# EAGLE board SparkFun_USB_RS485_Converter_Panel_v11 (EAGLE 7.4.0), part 1 of 4
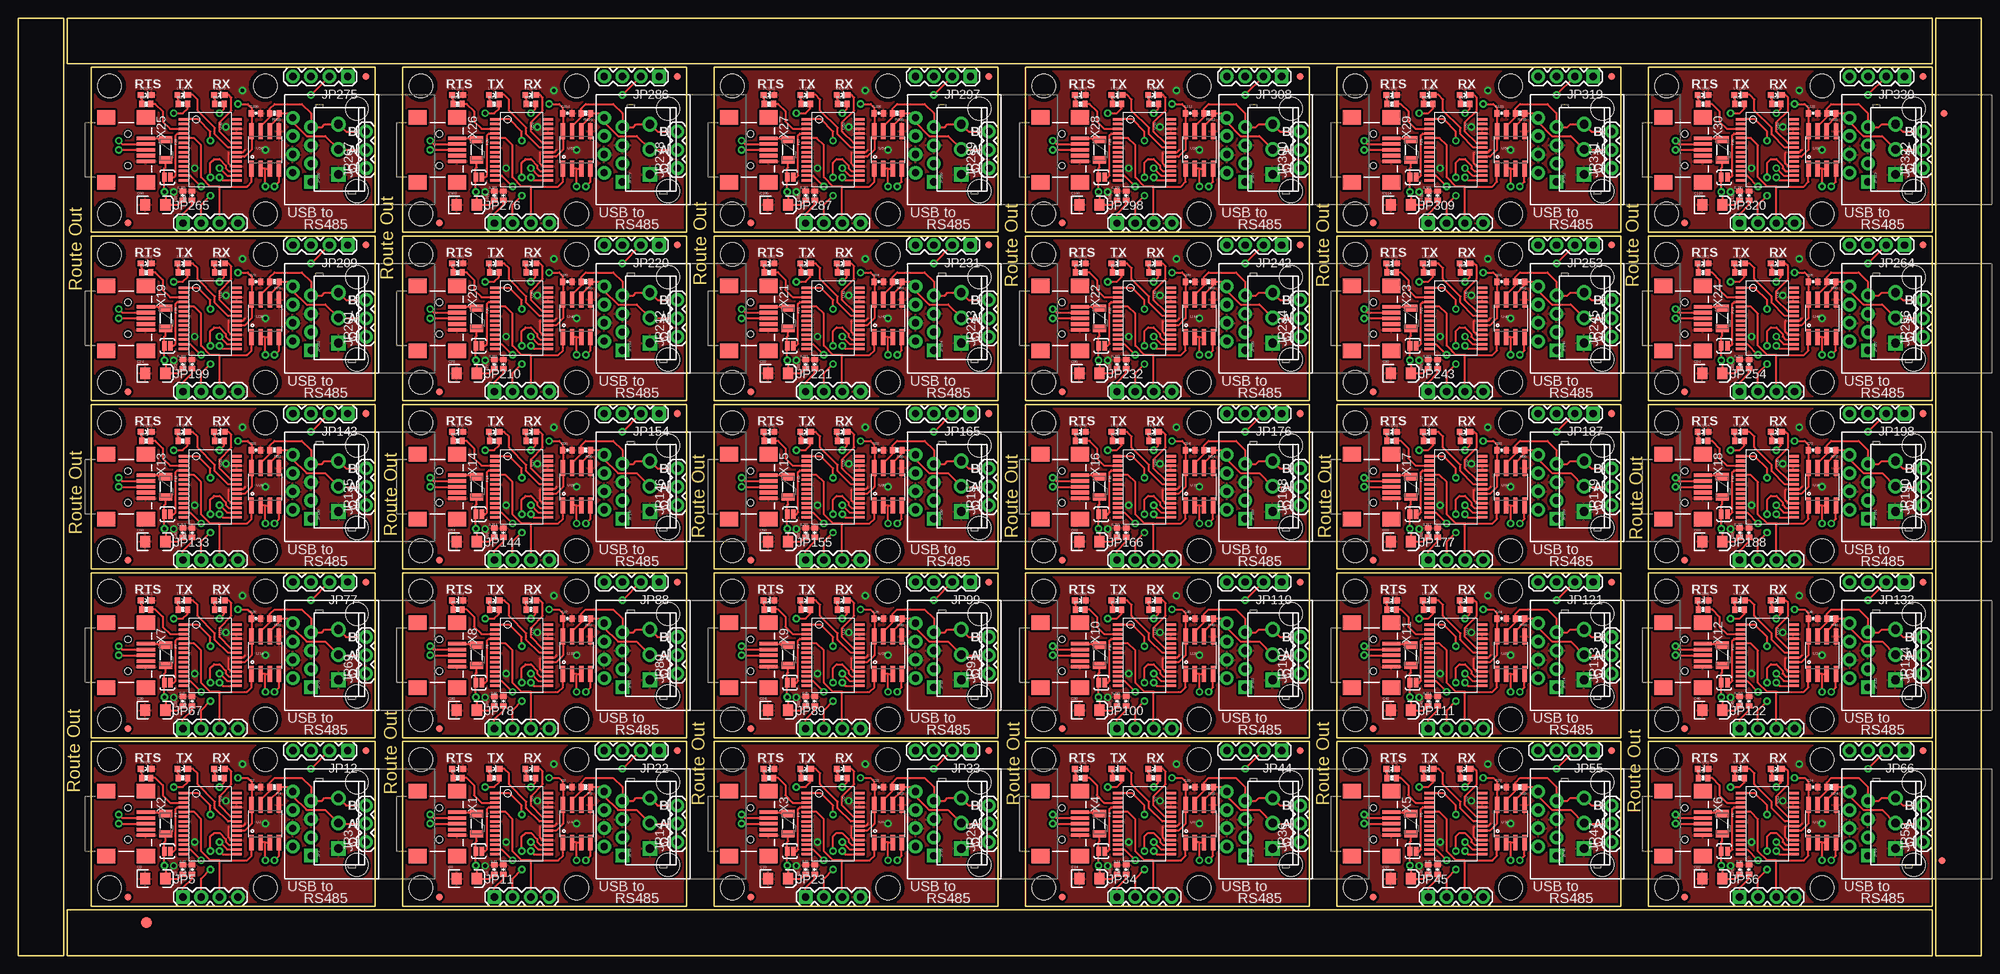
[diagram p0: board, top side]
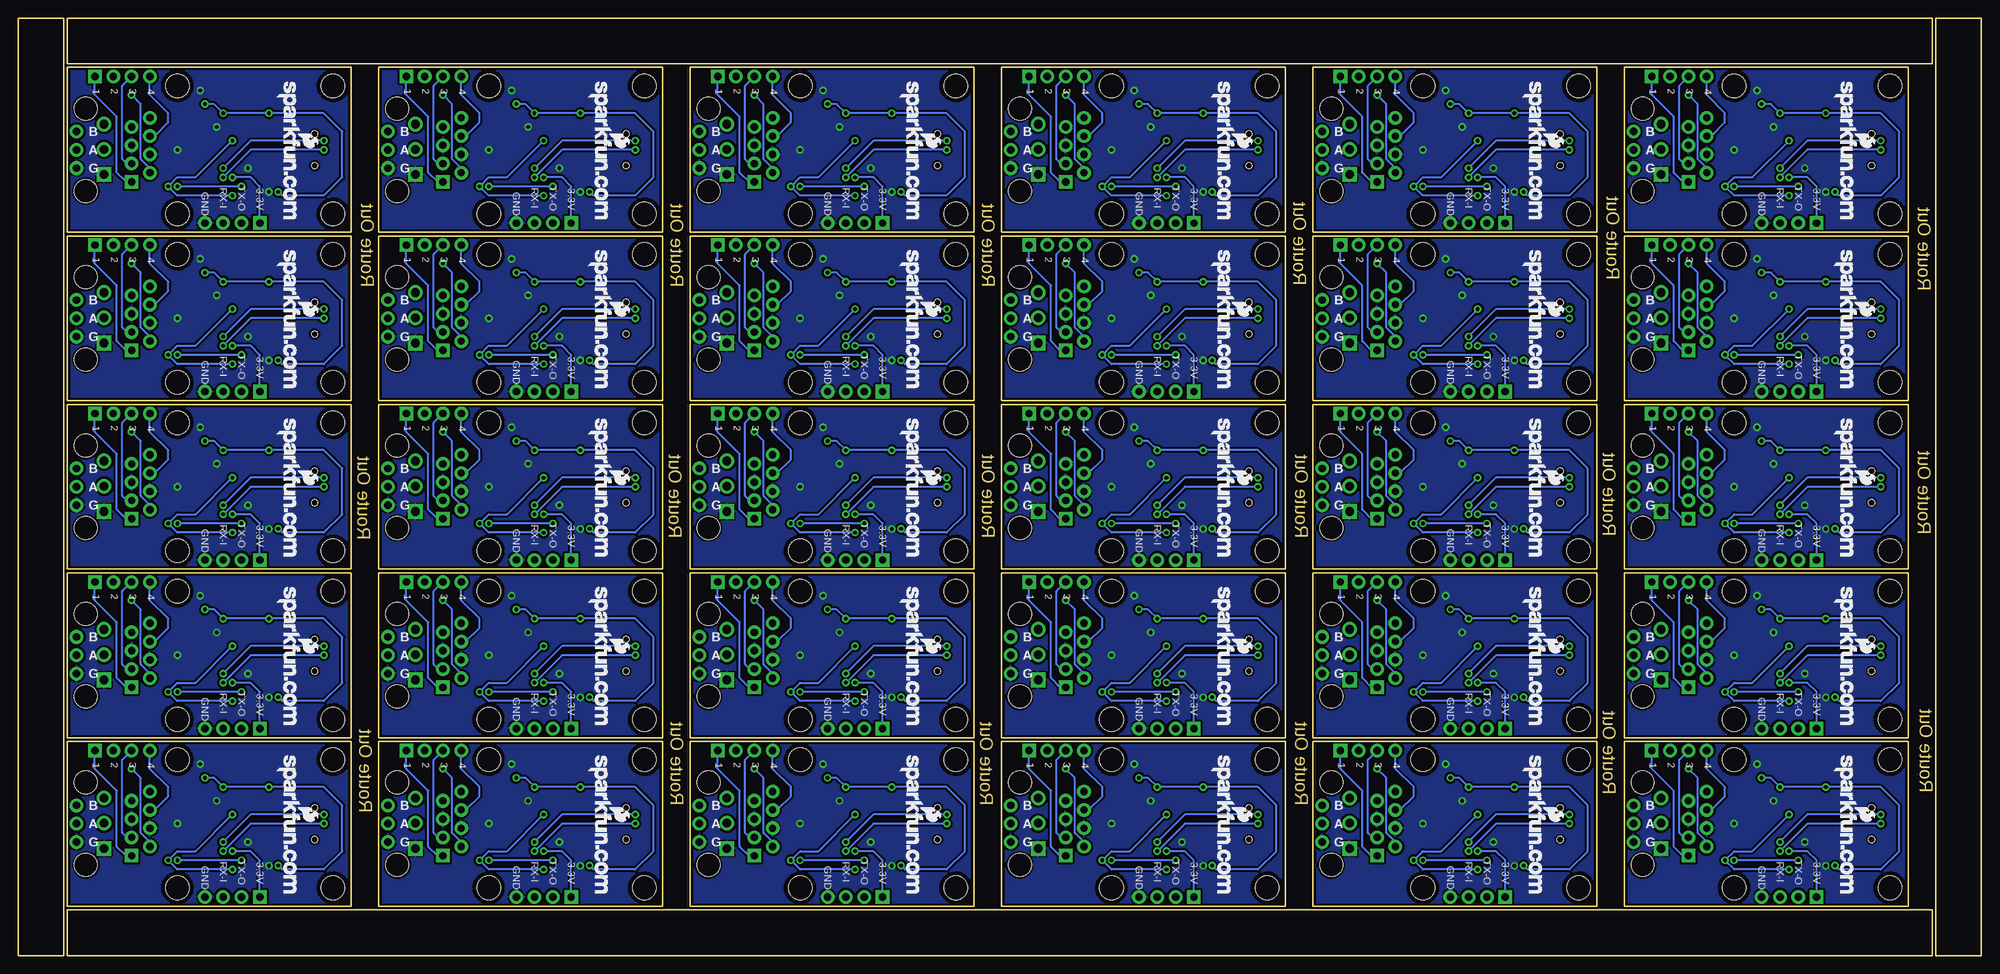
[diagram p1: board, bottom side, seen from below]

Size 272.29 x 130.05 mm. Coordinates in mm from the lower left corner, seen from the top.
Outline: 6.35,79.25 6.35,0 0,0 0,29.72
Outline: 0,27.18 0,130.05 6.35,130.05 6.35,76.71
Outline: 82.55,0 6.86,0 6.86,6.35 33.02,6.35
Outline: 30.48,6.35 265.43,6.35 265.43,0 80.01,0
Outline: 272.29,79.25 272.29,0 265.94,0 265.94,29.72
Outline: 265.94,27.18 265.94,130.05 272.29,130.05 272.29,76.71
Outline: 193.04,130.05 265.43,130.05 265.43,123.7 242.57,123.7
Outline: 245.11,123.7 6.86,123.7 6.86,130.05 195.58,130.05
Outline: 49.53,6.86 10.16,6.86 10.16,29.72 49.53,29.72 49.53,6.86
Outline: 92.71,6.86 53.34,6.86 53.34,29.72 92.71,29.72 92.71,6.86
Outline: 135.89,6.86 96.52,6.86 96.52,29.72 135.89,29.72 135.89,6.86
Outline: 179.07,6.86 139.7,6.86 139.7,29.72 179.07,29.72 179.07,6.86
Outline: 222.25,6.86 182.88,6.86 182.88,29.72 222.25,29.72 222.25,6.86
Outline: 265.43,6.86 226.06,6.86 226.06,29.72 265.43,29.72 265.43,6.86
Outline: 49.53,30.23 10.16,30.23 10.16,53.09 49.53,53.09 49.53,30.23
Outline: 92.71,30.23 53.34,30.23 53.34,53.09 92.71,53.09 92.71,30.23
Outline: 135.89,30.23 96.52,30.23 96.52,53.09 135.89,53.09 135.89,30.23
Outline: 179.07,30.23 139.7,30.23 139.7,53.09 179.07,53.09 179.07,30.23
Outline: 222.25,30.23 182.88,30.23 182.88,53.09 222.25,53.09 222.25,30.23
Outline: 265.43,30.23 226.06,30.23 226.06,53.09 265.43,53.09 265.43,30.23
Outline: 49.53,53.59 10.16,53.59 10.16,76.45 49.53,76.45 49.53,53.59
Outline: 92.71,53.59 53.34,53.59 53.34,76.45 92.71,76.45 92.71,53.59
Outline: 135.89,53.59 96.52,53.59 96.52,76.45 135.89,76.45 135.89,53.59
Outline: 179.07,53.59 139.7,53.59 139.7,76.45 179.07,76.45 179.07,53.59
Outline: 222.25,53.59 182.88,53.59 182.88,76.45 222.25,76.45 222.25,53.59
Outline: 265.43,53.59 226.06,53.59 226.06,76.45 265.43,76.45 265.43,53.59
Outline: 49.53,76.96 10.16,76.96 10.16,99.82 49.53,99.82 49.53,76.96
Outline: 92.71,76.96 53.34,76.96 53.34,99.82 92.71,99.82 92.71,76.96
Outline: 135.89,76.96 96.52,76.96 96.52,99.82 135.89,99.82 135.89,76.96
Outline: 179.07,76.96 139.7,76.96 139.7,99.82 179.07,99.82 179.07,76.96
Outline: 222.25,76.96 182.88,76.96 182.88,99.82 222.25,99.82 222.25,76.96
Outline: 265.43,76.96 226.06,76.96 226.06,99.82 265.43,99.82 265.43,76.96
Outline: 49.53,100.33 10.16,100.33 10.16,123.19 49.53,123.19 49.53,100.33
Outline: 92.71,100.33 53.34,100.33 53.34,123.19 92.71,123.19 92.71,100.33
Outline: 135.89,100.33 96.52,100.33 96.52,123.19 135.89,123.19 135.89,100.33
Outline: 179.07,100.33 139.7,100.33 139.7,123.19 179.07,123.19 179.07,100.33
Outline: 222.25,100.33 182.88,100.33 182.88,123.19 222.25,123.19 222.25,100.33
Outline: 265.43,100.33 226.06,100.33 226.06,123.19 265.43,123.19 265.43,100.33
Copper layers (1*16): Top 0.035mm / dielectric 1.5mm / Bottom 0.035mm
Design rules "SparkFun": minimum track width 8mil, minimum drill 20mil, track to track 8mil, track to pad 8mil, pad to pad 8mil, via to via 8mil, smd to smd 8mil, copper to edge 8mil, drill to drill 8mil, minimum pad ring 12mil, minimum via ring 10mil, stop-mask expansion 4mil, vias tented up to drill 20mil, thermal gap 10mil
Net classes: 0 default: width 0.203 mm; 1 power: width 0.254 mm

## Footprints (pad centres in the part's own frame; a part is rotated, then mirrored left to right if it is on the bottom)
0402-CAP = smd 0.7 x 0.9: 1 -0.65,0; 2 0.65,0
EIA3216 = smd 1.4 x 1.6: A 1.4,0; C -1.4,0
FIDUCIAL-1.5X3 = smd 1.5 x 1.5: 1 0,0
FIDUCIAL-1X2 = smd 1 x 1: 1 0,0
PTC-1206 = smd 1 x 1.8: 1 -1.4,0; 2 1.4,0
STAND-OFF = hole 3.302: 0,0
SCREWTERMINAL-3.5MM-3 = drill 1.2 pad 2.032 square: 1 0,0 | drill 1.2 pad 2.032: 2 3.5,0; 3 7,0
1X03 = drill 1.016 pad 1.88: 1 0,0; 2 2.54,0; 3 5.08,0
RJ45-8 = drill 1 pad 1.88 square: 1 -4.445,6.35 | drill 1 pad 1.88: 2 -3.175,8.89; 3 -1.905,6.35; 4 -0.635,8.89; 5 0.635,6.35; 6 1.905,8.89; 7 3.175,6.35; 8 4.445,8.89 | hole 3.2: -5.715,0; 5.715,0
1X04 = drill 1.016 pad 1.88 square: 1 0,0 | drill 1.016 pad 1.88: 2 2.54,0; 3 5.08,0; 4 7.62,0
LED-0603 = smd 0.8 x 0.8: A 0,-0.75; C 0,0.75
0402-RES = smd 0.7 x 0.9: 1 -0.65,0; 2 0.65,0
SJ_2S-NOTRACE = smd 0.635 x 1.27: 1 -0.45,0; 2 0.4,0
SSOP28DB = smd 0.348 x 1.397: 1 -4.225,-3.656; 2 -3.575,-3.656; 3 -2.925,-3.656; 4 -2.275,-3.656; 5 -1.625,-3.656; 6 -0.975,-3.656; 7 -0.325,-3.656; 8 0.325,-3.656; 9 0.975,-3.656; 10 1.625,-3.656; 11 2.275,-3.656; 12 2.925,-3.656; 13 3.575,-3.656; 14 4.225,-3.656; 15 4.225,3.656; 16 3.575,3.656; 17 2.925,3.656; 18 2.275,3.656; 19 1.625,3.656; 20 0.975,3.656; 21 0.325,3.656; 22 -0.325,3.656; 23 -0.975,3.656; 24 -1.625,3.656; 25 -2.275,3.656; 26 -2.925,3.656; 27 -3.575,3.656; 28 -4.225,3.656
SO08 = smd 0.61 x 2.21: 1 -1.905,-2.616; 2 -0.635,-2.616; 3 0.635,-2.616; 4 1.905,-2.616; 5 1.905,2.616; 6 0.635,2.616; 7 -0.635,2.616; 8 -1.905,2.616
USB-MINIB = smd 2.5 x 0.5: D+ 2.5,0; D- 2.5,0.8; GND 2.5,-1.6; ID 2.5,-0.8; VBUS 2.5,1.6 | smd 2.5 x 2: GND@1 -3,-4.5; GND@2 -3,4.5; GND@3 2.5,4.5; GND@4 2.5,-4.5 | hole 0.9: 0,2.2; 0,-2.2

## Placement (x,y rotation side)
C1  0.1uF  [0402-CAP]  24.13,11.94 90 top
C2  0.1uF  [0402-CAP]  22.86,11.94 90 top
C3  0.1uF  [0402-CAP]  33.02,23.37 0 top
C4  0.1uF  [0402-CAP]  66.04,11.94 90 top
C5  10uF  [EIA3216]  19.05,10.67 0 top
C6  10uF  [EIA3216]  62.23,10.67 0 top
C7  0.1uF  [0402-CAP]  67.31,11.94 90 top
C8  0.1uF  [0402-CAP]  76.2,23.37 0 top
C9  0.1uF  [0402-CAP]  109.22,11.94 90 top
C10  10uF  [EIA3216]  105.41,10.67 0 top
C11  0.1uF  [0402-CAP]  110.49,11.94 90 top
C12  0.1uF  [0402-CAP]  119.38,23.37 0 top
C13  0.1uF  [0402-CAP]  152.4,11.94 90 top
C14  10uF  [EIA3216]  148.59,10.67 0 top
C15  0.1uF  [0402-CAP]  153.67,11.94 90 top
C16  0.1uF  [0402-CAP]  162.56,23.37 0 top
C17  0.1uF  [0402-CAP]  195.58,11.94 90 top
C18  10uF  [EIA3216]  191.77,10.67 0 top
C19  0.1uF  [0402-CAP]  196.85,11.94 90 top
C20  0.1uF  [0402-CAP]  205.74,23.37 0 top
C21  0.1uF  [0402-CAP]  238.76,11.94 90 top
C22  10uF  [EIA3216]  234.95,10.67 0 top
C23  0.1uF  [0402-CAP]  240.03,11.94 90 top
C24  0.1uF  [0402-CAP]  248.92,23.37 0 top
C25  0.1uF  [0402-CAP]  22.86,35.31 90 top
C26  10uF  [EIA3216]  19.05,34.04 0 top
C27  0.1uF  [0402-CAP]  24.13,35.31 90 top
C28  0.1uF  [0402-CAP]  33.02,46.74 0 top
C29  0.1uF  [0402-CAP]  66.04,35.31 90 top
C30  10uF  [EIA3216]  62.23,34.04 0 top
C31  0.1uF  [0402-CAP]  67.31,35.31 90 top
C32  0.1uF  [0402-CAP]  76.2,46.74 0 top
C33  0.1uF  [0402-CAP]  109.22,35.31 90 top
C34  10uF  [EIA3216]  105.41,34.04 0 top
C35  0.1uF  [0402-CAP]  110.49,35.31 90 top
C36  0.1uF  [0402-CAP]  119.38,46.74 0 top
C37  0.1uF  [0402-CAP]  152.4,35.31 90 top
C38  10uF  [EIA3216]  148.59,34.04 0 top
C39  0.1uF  [0402-CAP]  153.67,35.31 90 top
C40  0.1uF  [0402-CAP]  162.56,46.74 0 top
C41  0.1uF  [0402-CAP]  195.58,35.31 90 top
C42  10uF  [EIA3216]  191.77,34.04 0 top
C43  0.1uF  [0402-CAP]  196.85,35.31 90 top
C44  0.1uF  [0402-CAP]  205.74,46.74 0 top
C45  0.1uF  [0402-CAP]  238.76,35.31 90 top
C46  10uF  [EIA3216]  234.95,34.04 0 top
C47  0.1uF  [0402-CAP]  240.03,35.31 90 top
C48  0.1uF  [0402-CAP]  248.92,46.74 0 top
C49  0.1uF  [0402-CAP]  22.86,58.67 90 top
C50  10uF  [EIA3216]  19.05,57.4 0 top
C51  0.1uF  [0402-CAP]  24.13,58.67 90 top
C52  0.1uF  [0402-CAP]  33.02,70.1 0 top
C53  0.1uF  [0402-CAP]  66.04,58.67 90 top
C54  10uF  [EIA3216]  62.23,57.4 0 top
C55  0.1uF  [0402-CAP]  67.31,58.67 90 top
C56  0.1uF  [0402-CAP]  76.2,70.1 0 top
C57  0.1uF  [0402-CAP]  109.22,58.67 90 top
C58  10uF  [EIA3216]  105.41,57.4 0 top
C59  0.1uF  [0402-CAP]  110.49,58.67 90 top
C60  0.1uF  [0402-CAP]  119.38,70.1 0 top
C61  0.1uF  [0402-CAP]  152.4,58.67 90 top
C62  10uF  [EIA3216]  148.59,57.4 0 top
C63  0.1uF  [0402-CAP]  153.67,58.67 90 top
C64  0.1uF  [0402-CAP]  162.56,70.1 0 top
C65  0.1uF  [0402-CAP]  195.58,58.67 90 top
C66  10uF  [EIA3216]  191.77,57.4 0 top
C67  0.1uF  [0402-CAP]  196.85,58.67 90 top
C68  0.1uF  [0402-CAP]  205.74,70.1 0 top
C69  0.1uF  [0402-CAP]  238.76,58.67 90 top
C70  10uF  [EIA3216]  234.95,57.4 0 top
C71  0.1uF  [0402-CAP]  240.03,58.67 90 top
C72  0.1uF  [0402-CAP]  248.92,70.1 0 top
C73  0.1uF  [0402-CAP]  22.86,82.04 90 top
C74  10uF  [EIA3216]  19.05,80.77 0 top
C75  0.1uF  [0402-CAP]  24.13,82.04 90 top
C76  0.1uF  [0402-CAP]  33.02,93.47 0 top
C77  0.1uF  [0402-CAP]  66.04,82.04 90 top
C78  10uF  [EIA3216]  62.23,80.77 0 top
C79  0.1uF  [0402-CAP]  67.31,82.04 90 top
C80  0.1uF  [0402-CAP]  76.2,93.47 0 top
C81  0.1uF  [0402-CAP]  109.22,82.04 90 top
C82  10uF  [EIA3216]  105.41,80.77 0 top
C83  0.1uF  [0402-CAP]  110.49,82.04 90 top
C84  0.1uF  [0402-CAP]  119.38,93.47 0 top
C85  0.1uF  [0402-CAP]  152.4,82.04 90 top
C86  10uF  [EIA3216]  148.59,80.77 0 top
C87  0.1uF  [0402-CAP]  153.67,82.04 90 top
C88  0.1uF  [0402-CAP]  162.56,93.47 0 top
C89  0.1uF  [0402-CAP]  195.58,82.04 90 top
C90  10uF  [EIA3216]  191.77,80.77 0 top
C91  0.1uF  [0402-CAP]  196.85,82.04 90 top
C92  0.1uF  [0402-CAP]  205.74,93.47 0 top
C93  0.1uF  [0402-CAP]  238.76,82.04 90 top
C94  10uF  [EIA3216]  234.95,80.77 0 top
C95  0.1uF  [0402-CAP]  240.03,82.04 90 top
C96  0.1uF  [0402-CAP]  248.92,93.47 0 top
C97  0.1uF  [0402-CAP]  22.86,105.41 90 top
C98  10uF  [EIA3216]  19.05,104.14 0 top
C99  0.1uF  [0402-CAP]  24.13,105.41 90 top
C100  0.1uF  [0402-CAP]  33.02,116.84 0 top
C101  0.1uF  [0402-CAP]  66.04,105.41 90 top
C102  10uF  [EIA3216]  62.23,104.14 0 top
C103  0.1uF  [0402-CAP]  67.31,105.41 90 top
C104  0.1uF  [0402-CAP]  76.2,116.84 0 top
C105  0.1uF  [0402-CAP]  109.22,105.41 90 top
C106  10uF  [EIA3216]  105.41,104.14 0 top
C107  0.1uF  [0402-CAP]  110.49,105.41 90 top
C108  0.1uF  [0402-CAP]  119.38,116.84 0 top
C109  0.1uF  [0402-CAP]  152.4,105.41 90 top
C110  10uF  [EIA3216]  148.59,104.14 0 top
C111  0.1uF  [0402-CAP]  153.67,105.41 90 top
C112  0.1uF  [0402-CAP]  162.56,116.84 0 top
C113  0.1uF  [0402-CAP]  195.58,105.41 90 top
C114  10uF  [EIA3216]  191.77,104.14 0 top
C115  0.1uF  [0402-CAP]  196.85,105.41 90 top
C116  0.1uF  [0402-CAP]  205.74,116.84 0 top
C117  0.1uF  [0402-CAP]  238.76,105.41 90 top
C118  10uF  [EIA3216]  234.95,104.14 0 top
C119  0.1uF  [0402-CAP]  240.03,105.41 90 top
C120  0.1uF  [0402-CAP]  248.92,116.84 0 top
E$1  [FIDUCIAL-1.5X3]  17.78,4.57 0 top
E$5  [FIDUCIAL-1X2]  266.83,13.21 0 top
E$6  [FIDUCIAL-1X2]  267.08,116.84 180 top
F1  500mA  [PTC-1206]  20.45,18.29 270 top
F2  500mA  [PTC-1206]  63.63,18.29 270 top
F3  500mA  [PTC-1206]  106.81,18.29 270 top
F4  500mA  [PTC-1206]  149.99,18.29 270 top
F5  500mA  [PTC-1206]  193.17,18.29 270 top
F6  500mA  [PTC-1206]  236.35,18.29 270 top
F7  500mA  [PTC-1206]  20.45,41.66 270 top
F8  500mA  [PTC-1206]  63.63,41.66 270 top
F9  500mA  [PTC-1206]  106.81,41.66 270 top
F10  500mA  [PTC-1206]  149.99,41.66 270 top
F11  500mA  [PTC-1206]  193.17,41.66 270 top
F12  500mA  [PTC-1206]  236.35,41.66 270 top
F13  500mA  [PTC-1206]  20.45,65.02 270 top
F14  500mA  [PTC-1206]  63.63,65.02 270 top
F15  500mA  [PTC-1206]  106.81,65.02 270 top
F16  500mA  [PTC-1206]  149.99,65.02 270 top
F17  500mA  [PTC-1206]  193.17,65.02 270 top
F18  500mA  [PTC-1206]  236.35,65.02 270 top
F19  500mA  [PTC-1206]  20.45,88.39 270 top
F20  500mA  [PTC-1206]  63.63,88.39 270 top
F21  500mA  [PTC-1206]  106.81,88.39 270 top
F22  500mA  [PTC-1206]  149.99,88.39 270 top
F23  500mA  [PTC-1206]  193.17,88.39 270 top
F24  500mA  [PTC-1206]  236.35,88.39 270 top
F25  500mA  [PTC-1206]  20.45,111.76 270 top
F26  500mA  [PTC-1206]  63.63,111.76 270 top
F27  500mA  [PTC-1206]  106.81,111.76 270 top
F28  500mA  [PTC-1206]  149.99,111.76 270 top
F29  500mA  [PTC-1206]  193.17,111.76 270 top
F30  500mA  [PTC-1206]  236.35,111.76 270 top
JP1  STAND-OFF  [STAND-OFF]  12.7,27.18 0 top
JP2  [SCREWTERMINAL-3.5MM-3]  44.45,14.86 90 top
JP3  [1X03]  48.26,15.75 90 top
JP4  RJ45-8PTH  [RJ45-8]  46.99,18.29 90 top
JP5  [1X04]  22.86,8.13 0 top
JP6  STAND-OFF  [STAND-OFF]  12.7,9.4 0 top
JP7  STAND-OFF  [STAND-OFF]  34.29,27.18 0 top
JP8  STAND-OFF  [STAND-OFF]  34.29,9.4 0 top
JP9  FIDUCIAL1X2  [FIDUCIAL-1X2]  15.24,8.13 0 top
JP10  FIDUCIAL1X2  [FIDUCIAL-1X2]  48.26,28.45 0 top
JP11  [1X04]  66.04,8.13 0 top
JP12  Unused Pins  [1X04]  45.72,28.45 180 top
JP13  RJ45-8PTH  [RJ45-8]  90.17,18.29 90 top
JP14  [1X03]  91.44,15.75 90 top
JP15  [SCREWTERMINAL-3.5MM-3]  87.63,14.86 90 top
JP16  STAND-OFF  [STAND-OFF]  55.88,27.18 0 top
JP17  STAND-OFF  [STAND-OFF]  55.88,9.4 0 top
JP18  STAND-OFF  [STAND-OFF]  77.47,27.18 0 top
JP19  STAND-OFF  [STAND-OFF]  77.47,9.4 0 top
JP20  FIDUCIAL1X2  [FIDUCIAL-1X2]  58.42,8.13 0 top
JP21  FIDUCIAL1X2  [FIDUCIAL-1X2]  91.44,28.45 0 top
JP22  Unused Pins  [1X04]  88.9,28.45 180 top
JP23  [1X04]  109.22,8.13 0 top
JP24  RJ45-8PTH  [RJ45-8]  133.35,18.29 90 top
JP25  [1X03]  134.62,15.75 90 top
JP26  [SCREWTERMINAL-3.5MM-3]  130.81,14.86 90 top
JP27  STAND-OFF  [STAND-OFF]  99.06,27.18 0 top
JP28  STAND-OFF  [STAND-OFF]  99.06,9.4 0 top
JP29  STAND-OFF  [STAND-OFF]  120.65,27.18 0 top
JP30  STAND-OFF  [STAND-OFF]  120.65,9.4 0 top
JP31  FIDUCIAL1X2  [FIDUCIAL-1X2]  101.6,8.13 0 top
JP32  FIDUCIAL1X2  [FIDUCIAL-1X2]  134.62,28.45 0 top
JP33  Unused Pins  [1X04]  132.08,28.45 180 top
JP34  [1X04]  152.4,8.13 0 top
JP35  RJ45-8PTH  [RJ45-8]  176.53,18.29 90 top
JP36  [1X03]  177.8,15.75 90 top
JP37  [SCREWTERMINAL-3.5MM-3]  173.99,14.86 90 top
JP38  STAND-OFF  [STAND-OFF]  142.24,27.18 0 top
JP39  STAND-OFF  [STAND-OFF]  142.24,9.4 0 top
JP40  STAND-OFF  [STAND-OFF]  163.83,27.18 0 top
JP41  STAND-OFF  [STAND-OFF]  163.83,9.4 0 top
JP42  FIDUCIAL1X2  [FIDUCIAL-1X2]  144.78,8.13 0 top
JP43  FIDUCIAL1X2  [FIDUCIAL-1X2]  177.8,28.45 0 top
JP44  Unused Pins  [1X04]  175.26,28.45 180 top
JP45  [1X04]  195.58,8.13 0 top
JP46  RJ45-8PTH  [RJ45-8]  219.71,18.29 90 top
JP47  [1X03]  220.98,15.75 90 top
JP48  [SCREWTERMINAL-3.5MM-3]  217.17,14.86 90 top
JP49  STAND-OFF  [STAND-OFF]  185.42,27.18 0 top
JP50  STAND-OFF  [STAND-OFF]  185.42,9.4 0 top
JP51  STAND-OFF  [STAND-OFF]  207.01,27.18 0 top
JP52  STAND-OFF  [STAND-OFF]  207.01,9.4 0 top
JP53  FIDUCIAL1X2  [FIDUCIAL-1X2]  187.96,8.13 0 top
JP54  FIDUCIAL1X2  [FIDUCIAL-1X2]  220.98,28.45 0 top
JP55  Unused Pins  [1X04]  218.44,28.45 180 top
JP56  [1X04]  238.76,8.13 0 top
JP57  RJ45-8PTH  [RJ45-8]  262.89,18.29 90 top
JP58  [1X03]  264.16,15.75 90 top
JP59  [SCREWTERMINAL-3.5MM-3]  260.35,14.86 90 top
JP60  STAND-OFF  [STAND-OFF]  228.6,27.18 0 top
JP61  STAND-OFF  [STAND-OFF]  228.6,9.4 0 top
JP62  STAND-OFF  [STAND-OFF]  250.19,27.18 0 top
JP63  STAND-OFF  [STAND-OFF]  250.19,9.4 0 top
JP64  FIDUCIAL1X2  [FIDUCIAL-1X2]  231.14,8.13 0 top
JP65  FIDUCIAL1X2  [FIDUCIAL-1X2]  264.16,28.45 0 top
JP66  Unused Pins  [1X04]  261.62,28.45 180 top
JP67  [1X04]  22.86,31.5 0 top
JP68  RJ45-8PTH  [RJ45-8]  46.99,41.66 90 top
JP69  [1X03]  48.26,39.12 90 top
JP70  [SCREWTERMINAL-3.5MM-3]  44.45,38.23 90 top
JP71  STAND-OFF  [STAND-OFF]  12.7,50.55 0 top
JP72  STAND-OFF  [STAND-OFF]  12.7,32.77 0 top
JP73  STAND-OFF  [STAND-OFF]  34.29,50.55 0 top
JP74  STAND-OFF  [STAND-OFF]  34.29,32.77 0 top
JP75  FIDUCIAL1X2  [FIDUCIAL-1X2]  15.24,31.5 0 top
JP76  FIDUCIAL1X2  [FIDUCIAL-1X2]  48.26,51.82 0 top
JP77  Unused Pins  [1X04]  45.72,51.82 180 top
JP78  [1X04]  66.04,31.5 0 top
JP79  RJ45-8PTH  [RJ45-8]  90.17,41.66 90 top
JP80  [1X03]  91.44,39.12 90 top
JP81  [SCREWTERMINAL-3.5MM-3]  87.63,38.23 90 top
JP82  STAND-OFF  [STAND-OFF]  55.88,50.55 0 top
JP83  STAND-OFF  [STAND-OFF]  55.88,32.77 0 top
JP84  STAND-OFF  [STAND-OFF]  77.47,50.55 0 top
JP85  STAND-OFF  [STAND-OFF]  77.47,32.77 0 top
JP86  FIDUCIAL1X2  [FIDUCIAL-1X2]  58.42,31.5 0 top
JP87  FIDUCIAL1X2  [FIDUCIAL-1X2]  91.44,51.82 0 top
JP88  Unused Pins  [1X04]  88.9,51.82 180 top
JP89  [1X04]  109.22,31.5 0 top
JP90  RJ45-8PTH  [RJ45-8]  133.35,41.66 90 top
JP91  [1X03]  134.62,39.12 90 top
JP92  [SCREWTERMINAL-3.5MM-3]  130.81,38.23 90 top
JP93  STAND-OFF  [STAND-OFF]  99.06,50.55 0 top
JP94  STAND-OFF  [STAND-OFF]  99.06,32.77 0 top
JP95  STAND-OFF  [STAND-OFF]  120.65,50.55 0 top
JP96  STAND-OFF  [STAND-OFF]  120.65,32.77 0 top
JP97  FIDUCIAL1X2  [FIDUCIAL-1X2]  101.6,31.5 0 top
JP98  FIDUCIAL1X2  [FIDUCIAL-1X2]  134.62,51.82 0 top
JP99  Unused Pins  [1X04]  132.08,51.82 180 top
JP100  [1X04]  152.4,31.5 0 top
JP101  RJ45-8PTH  [RJ45-8]  176.53,41.66 90 top
JP102  [1X03]  177.8,39.12 90 top
JP103  [SCREWTERMINAL-3.5MM-3]  173.99,38.23 90 top
JP104  STAND-OFF  [STAND-OFF]  142.24,50.55 0 top
JP105  STAND-OFF  [STAND-OFF]  142.24,32.77 0 top
JP106  STAND-OFF  [STAND-OFF]  163.83,50.55 0 top
JP107  STAND-OFF  [STAND-OFF]  163.83,32.77 0 top
JP108  FIDUCIAL1X2  [FIDUCIAL-1X2]  144.78,31.5 0 top
JP109  FIDUCIAL1X2  [FIDUCIAL-1X2]  177.8,51.82 0 top
JP110  Unused Pins  [1X04]  175.26,51.82 180 top
JP111  [1X04]  195.58,31.5 0 top
JP112  RJ45-8PTH  [RJ45-8]  219.71,41.66 90 top
JP113  [1X03]  220.98,39.12 90 top
JP114  [SCREWTERMINAL-3.5MM-3]  217.17,38.23 90 top
JP115  STAND-OFF  [STAND-OFF]  185.42,50.55 0 top
JP116  STAND-OFF  [STAND-OFF]  185.42,32.77 0 top
JP117  STAND-OFF  [STAND-OFF]  207.01,50.55 0 top
JP118  STAND-OFF  [STAND-OFF]  207.01,32.77 0 top
JP119  FIDUCIAL1X2  [FIDUCIAL-1X2]  187.96,31.5 0 top
JP120  FIDUCIAL1X2  [FIDUCIAL-1X2]  220.98,51.82 0 top
JP121  Unused Pins  [1X04]  218.44,51.82 180 top
JP122  [1X04]  238.76,31.5 0 top
JP123  RJ45-8PTH  [RJ45-8]  262.89,41.66 90 top
JP124  [1X03]  264.16,39.12 90 top
JP125  [SCREWTERMINAL-3.5MM-3]  260.35,38.23 90 top
JP126  STAND-OFF  [STAND-OFF]  228.6,50.55 0 top
JP127  STAND-OFF  [STAND-OFF]  228.6,32.77 0 top
JP128  STAND-OFF  [STAND-OFF]  250.19,50.55 0 top
JP129  STAND-OFF  [STAND-OFF]  250.19,32.77 0 top
JP130  FIDUCIAL1X2  [FIDUCIAL-1X2]  231.14,31.5 0 top
JP131  FIDUCIAL1X2  [FIDUCIAL-1X2]  264.16,51.82 0 top
JP132  Unused Pins  [1X04]  261.62,51.82 180 top
JP133  [1X04]  22.86,54.86 0 top
JP134  RJ45-8PTH  [RJ45-8]  46.99,65.02 90 top
JP135  [1X03]  48.26,62.48 90 top
JP136  [SCREWTERMINAL-3.5MM-3]  44.45,61.59 90 top
JP137  STAND-OFF  [STAND-OFF]  12.7,73.91 0 top
JP138  STAND-OFF  [STAND-OFF]  12.7,56.13 0 top
JP139  STAND-OFF  [STAND-OFF]  34.29,73.91 0 top
JP140  STAND-OFF  [STAND-OFF]  34.29,56.13 0 top
JP141  FIDUCIAL1X2  [FIDUCIAL-1X2]  15.24,54.86 0 top
JP142  FIDUCIAL1X2  [FIDUCIAL-1X2]  48.26,75.18 0 top
JP143  Unused Pins  [1X04]  45.72,75.18 180 top
JP144  [1X04]  66.04,54.86 0 top
JP145  RJ45-8PTH  [RJ45-8]  90.17,65.02 90 top
JP146  [1X03]  91.44,62.48 90 top
JP147  [SCREWTERMINAL-3.5MM-3]  87.63,61.59 90 top
JP148  STAND-OFF  [STAND-OFF]  55.88,73.91 0 top
JP149  STAND-OFF  [STAND-OFF]  55.88,56.13 0 top
JP150  STAND-OFF  [STAND-OFF]  77.47,73.91 0 top
JP151  STAND-OFF  [STAND-OFF]  77.47,56.13 0 top
JP152  FIDUCIAL1X2  [FIDUCIAL-1X2]  58.42,54.86 0 top
JP153  FIDUCIAL1X2  [FIDUCIAL-1X2]  91.44,75.18 0 top
JP154  Unused Pins  [1X04]  88.9,75.18 180 top
JP155  [1X04]  109.22,54.86 0 top
JP156  RJ45-8PTH  [RJ45-8]  133.35,65.02 90 top
JP157  [1X03]  134.62,62.48 90 top
JP158  [SCREWTERMINAL-3.5MM-3]  130.81,61.59 90 top
JP159  STAND-OFF  [STAND-OFF]  99.06,73.91 0 top
JP160  STAND-OFF  [STAND-OFF]  99.06,56.13 0 top
JP161  STAND-OFF  [STAND-OFF]  120.65,73.91 0 top
JP162  STAND-OFF  [STAND-OFF]  120.65,56.13 0 top
JP163  FIDUCIAL1X2  [FIDUCIAL-1X2]  101.6,54.86 0 top
JP164  FIDUCIAL1X2  [FIDUCIAL-1X2]  134.62,75.18 0 top
JP165  Unused Pins  [1X04]  132.08,75.18 180 top
JP166  [1X04]  152.4,54.86 0 top
JP167  RJ45-8PTH  [RJ45-8]  176.53,65.02 90 top
JP168  [1X03]  177.8,62.48 90 top
JP169  [SCREWTERMINAL-3.5MM-3]  173.99,61.59 90 top
JP170  STAND-OFF  [STAND-OFF]  142.24,73.91 0 top
JP171  STAND-OFF  [STAND-OFF]  142.24,56.13 0 top
JP172  STAND-OFF  [STAND-OFF]  163.83,73.91 0 top
JP173  STAND-OFF  [STAND-OFF]  163.83,56.13 0 top
JP174  FIDUCIAL1X2  [FIDUCIAL-1X2]  144.78,54.86 0 top
JP175  FIDUCIAL1X2  [FIDUCIAL-1X2]  177.8,75.18 0 top
JP176  Unused Pins  [1X04]  175.26,75.18 180 top
JP177  [1X04]  195.58,54.86 0 top
JP178  RJ45-8PTH  [RJ45-8]  219.71,65.02 90 top
JP179  [1X03]  220.98,62.48 90 top
JP180  [SCREWTERMINAL-3.5MM-3]  217.17,61.59 90 top
JP181  STAND-OFF  [STAND-OFF]  185.42,73.91 0 top
JP182  STAND-OFF  [STAND-OFF]  185.42,56.13 0 top
JP183  STAND-OFF  [STAND-OFF]  207.01,73.91 0 top
JP184  STAND-OFF  [STAND-OFF]  207.01,56.13 0 top
JP185  FIDUCIAL1X2  [FIDUCIAL-1X2]  187.96,54.86 0 top
JP186  FIDUCIAL1X2  [FIDUCIAL-1X2]  220.98,75.18 0 top
JP187  Unused Pins  [1X04]  218.44,75.18 180 top
JP188  [1X04]  238.76,54.86 0 top
JP189  RJ45-8PTH  [RJ45-8]  262.89,65.02 90 top
JP190  [1X03]  264.16,62.48 90 top
JP191  [SCREWTERMINAL-3.5MM-3]  260.35,61.59 90 top
JP192  STAND-OFF  [STAND-OFF]  228.6,73.91 0 top
JP193  STAND-OFF  [STAND-OFF]  228.6,56.13 0 top
JP194  STAND-OFF  [STAND-OFF]  250.19,73.91 0 top
JP195  STAND-OFF  [STAND-OFF]  250.19,56.13 0 top
JP196  FIDUCIAL1X2  [FIDUCIAL-1X2]  231.14,54.86 0 top
JP197  FIDUCIAL1X2  [FIDUCIAL-1X2]  264.16,75.18 0 top
JP198  Unused Pins  [1X04]  261.62,75.18 180 top
JP199  [1X04]  22.86,78.23 0 top
JP200  RJ45-8PTH  [RJ45-8]  46.99,88.39 90 top
JP201  [1X03]  48.26,85.85 90 top
JP202  [SCREWTERMINAL-3.5MM-3]  44.45,84.96 90 top
JP203  STAND-OFF  [STAND-OFF]  12.7,97.28 0 top
JP204  STAND-OFF  [STAND-OFF]  12.7,79.5 0 top
JP205  STAND-OFF  [STAND-OFF]  34.29,97.28 0 top
JP206  STAND-OFF  [STAND-OFF]  34.29,79.5 0 top
JP207  FIDUCIAL1X2  [FIDUCIAL-1X2]  15.24,78.23 0 top
JP208  FIDUCIAL1X2  [FIDUCIAL-1X2]  48.26,98.55 0 top
JP209  Unused Pins  [1X04]  45.72,98.55 180 top
JP210  [1X04]  66.04,78.23 0 top
JP211  RJ45-8PTH  [RJ45-8]  90.17,88.39 90 top
JP212  [1X03]  91.44,85.85 90 top
JP213  [SCREWTERMINAL-3.5MM-3]  87.63,84.96 90 top
JP214  STAND-OFF  [STAND-OFF]  55.88,97.28 0 top
JP215  STAND-OFF  [STAND-OFF]  55.88,79.5 0 top
JP216  STAND-OFF  [STAND-OFF]  77.47,97.28 0 top
JP217  STAND-OFF  [STAND-OFF]  77.47,79.5 0 top
JP218  FIDUCIAL1X2  [FIDUCIAL-1X2]  58.42,78.23 0 top
JP219  FIDUCIAL1X2  [FIDUCIAL-1X2]  91.44,98.55 0 top
JP220  Unused Pins  [1X04]  88.9,98.55 180 top
JP221  [1X04]  109.22,78.23 0 top
JP222  RJ45-8PTH  [RJ45-8]  133.35,88.39 90 top
JP223  [1X03]  134.62,85.85 90 top
JP224  [SCREWTERMINAL-3.5MM-3]  130.81,84.96 90 top
JP225  STAND-OFF  [STAND-OFF]  99.06,97.28 0 top
JP226  STAND-OFF  [STAND-OFF]  99.06,79.5 0 top
JP227  STAND-OFF  [STAND-OFF]  120.65,97.28 0 top
JP228  STAND-OFF  [STAND-OFF]  120.65,79.5 0 top
JP229  FIDUCIAL1X2  [FIDUCIAL-1X2]  101.6,78.23 0 top
JP230  FIDUCIAL1X2  [FIDUCIAL-1X2]  134.62,98.55 0 top
JP231  Unused Pins  [1X04]  132.08,98.55 180 top
JP232  [1X04]  152.4,78.23 0 top
JP233  RJ45-8PTH  [RJ45-8]  176.53,88.39 90 top
JP234  [1X03]  177.8,85.85 90 top
JP235  [SCREWTERMINAL-3.5MM-3]  173.99,84.96 90 top
JP236  STAND-OFF  [STAND-OFF]  142.24,97.28 0 top
JP237  STAND-OFF  [STAND-OFF]  142.24,79.5 0 top
JP238  STAND-OFF  [STAND-OFF]  163.83,97.28 0 top
JP239  STAND-OFF  [STAND-OFF]  163.83,79.5 0 top
JP240  FIDUCIAL1X2  [FIDUCIAL-1X2]  144.78,78.23 0 top
JP241  FIDUCIAL1X2  [FIDUCIAL-1X2]  177.8,98.55 0 top
JP242  Unused Pins  [1X04]  175.26,98.55 180 top
JP243  [1X04]  195.58,78.23 0 top
JP244  RJ45-8PTH  [RJ45-8]  219.71,88.39 90 top
JP245  [1X03]  220.98,85.85 90 top
JP246  [SCREWTERMINAL-3.5MM-3]  217.17,84.96 90 top
JP247  STAND-OFF  [STAND-OFF]  185.42,97.28 0 top
JP248  STAND-OFF  [STAND-OFF]  185.42,79.5 0 top
JP249  STAND-OFF  [STAND-OFF]  207.01,97.28 0 top
JP250  STAND-OFF  [STAND-OFF]  207.01,79.5 0 top
JP251  FIDUCIAL1X2  [FIDUCIAL-1X2]  187.96,78.23 0 top
JP252  FIDUCIAL1X2  [FIDUCIAL-1X2]  220.98,98.55 0 top
JP253  Unused Pins  [1X04]  218.44,98.55 180 top
JP254  [1X04]  238.76,78.23 0 top
JP255  RJ45-8PTH  [RJ45-8]  262.89,88.39 90 top
JP256  [1X03]  264.16,85.85 90 top
JP257  [SCREWTERMINAL-3.5MM-3]  260.35,84.96 90 top
JP258  STAND-OFF  [STAND-OFF]  228.6,97.28 0 top
JP259  STAND-OFF  [STAND-OFF]  228.6,79.5 0 top
JP260  STAND-OFF  [STAND-OFF]  250.19,97.28 0 top
JP261  STAND-OFF  [STAND-OFF]  250.19,79.5 0 top
JP262  FIDUCIAL1X2  [FIDUCIAL-1X2]  231.14,78.23 0 top
JP263  FIDUCIAL1X2  [FIDUCIAL-1X2]  264.16,98.55 0 top
JP264  Unused Pins  [1X04]  261.62,98.55 180 top
JP265  [1X04]  22.86,101.6 0 top
JP266  RJ45-8PTH  [RJ45-8]  46.99,111.76 90 top
JP267  [1X03]  48.26,109.22 90 top
JP268  [SCREWTERMINAL-3.5MM-3]  44.45,108.33 90 top
JP269  STAND-OFF  [STAND-OFF]  12.7,120.65 0 top
JP270  STAND-OFF  [STAND-OFF]  12.7,102.87 0 top
JP271  STAND-OFF  [STAND-OFF]  34.29,120.65 0 top
JP272  STAND-OFF  [STAND-OFF]  34.29,102.87 0 top
JP273  FIDUCIAL1X2  [FIDUCIAL-1X2]  15.24,101.6 0 top
JP274  FIDUCIAL1X2  [FIDUCIAL-1X2]  48.26,121.92 0 top
JP275  Unused Pins  [1X04]  45.72,121.92 180 top
JP276  [1X04]  66.04,101.6 0 top
JP277  RJ45-8PTH  [RJ45-8]  90.17,111.76 90 top
JP278  [1X03]  91.44,109.22 90 top
JP279  [SCREWTERMINAL-3.5MM-3]  87.63,108.33 90 top
JP280  STAND-OFF  [STAND-OFF]  55.88,120.65 0 top
JP281  STAND-OFF  [STAND-OFF]  55.88,102.87 0 top
JP282  STAND-OFF  [STAND-OFF]  77.47,120.65 0 top
JP283  STAND-OFF  [STAND-OFF]  77.47,102.87 0 top
JP284  FIDUCIAL1X2  [FIDUCIAL-1X2]  58.42,101.6 0 top
JP285  FIDUCIAL1X2  [FIDUCIAL-1X2]  91.44,121.92 0 top
JP286  Unused Pins  [1X04]  88.9,121.92 180 top
JP287  [1X04]  109.22,101.6 0 top
JP288  RJ45-8PTH  [RJ45-8]  133.35,111.76 90 top
JP289  [1X03]  134.62,109.22 90 top
JP290  [SCREWTERMINAL-3.5MM-3]  130.81,108.33 90 top
JP291  STAND-OFF  [STAND-OFF]  99.06,120.65 0 top
JP292  STAND-OFF  [STAND-OFF]  99.06,102.87 0 top
JP293  STAND-OFF  [STAND-OFF]  120.65,120.65 0 top
JP294  STAND-OFF  [STAND-OFF]  120.65,102.87 0 top
JP295  FIDUCIAL1X2  [FIDUCIAL-1X2]  101.6,101.6 0 top
JP296  FIDUCIAL1X2  [FIDUCIAL-1X2]  134.62,121.92 0 top
JP297  Unused Pins  [1X04]  132.08,121.92 180 top
JP298  [1X04]  152.4,101.6 0 top
JP299  RJ45-8PTH  [RJ45-8]  176.53,111.76 90 top
JP300  [1X03]  177.8,109.22 90 top
JP301  [SCREWTERMINAL-3.5MM-3]  173.99,108.33 90 top
JP302  STAND-OFF  [STAND-OFF]  142.24,120.65 0 top
JP303  STAND-OFF  [STAND-OFF]  142.24,102.87 0 top
JP304  STAND-OFF  [STAND-OFF]  163.83,120.65 0 top
JP305  STAND-OFF  [STAND-OFF]  163.83,102.87 0 top
JP306  FIDUCIAL1X2  [FIDUCIAL-1X2]  144.78,101.6 0 top
JP307  FIDUCIAL1X2  [FIDUCIAL-1X2]  177.8,121.92 0 top
JP308  Unused Pins  [1X04]  175.26,121.92 180 top
JP309  [1X04]  195.58,101.6 0 top
JP310  RJ45-8PTH  [RJ45-8]  219.71,111.76 90 top
JP311  [1X03]  220.98,109.22 90 top
JP312  [SCREWTERMINAL-3.5MM-3]  217.17,108.33 90 top
JP313  STAND-OFF  [STAND-OFF]  185.42,120.65 0 top
JP314  STAND-OFF  [STAND-OFF]  185.42,102.87 0 top
JP315  STAND-OFF  [STAND-OFF]  207.01,120.65 0 top
JP316  STAND-OFF  [STAND-OFF]  207.01,102.87 0 top
JP317  FIDUCIAL1X2  [FIDUCIAL-1X2]  187.96,101.6 0 top
JP318  FIDUCIAL1X2  [FIDUCIAL-1X2]  220.98,121.92 0 top
JP319  Unused Pins  [1X04]  218.44,121.92 180 top
JP320  [1X04]  238.76,101.6 0 top
JP321  RJ45-8PTH  [RJ45-8]  262.89,111.76 90 top
JP322  [1X03]  264.16,109.22 90 top
JP323  [SCREWTERMINAL-3.5MM-3]  260.35,108.33 90 top
JP324  STAND-OFF  [STAND-OFF]  228.6,120.65 0 top
JP325  STAND-OFF  [STAND-OFF]  228.6,102.87 0 top
JP326  STAND-OFF  [STAND-OFF]  250.19,120.65 0 top
JP327  STAND-OFF  [STAND-OFF]  250.19,102.87 0 top
JP328  FIDUCIAL1X2  [FIDUCIAL-1X2]  231.14,101.6 0 top
JP329  FIDUCIAL1X2  [FIDUCIAL-1X2]  264.16,121.92 0 top
JP330  Unused Pins  [1X04]  261.62,121.92 180 top
LED1  Red  [LED-0603]  27.94,25.91 270 top
LED2  Green  [LED-0603]  22.86,25.91 270 top
LED3  Green  [LED-0603]  17.78,25.91 270 top
LED4  Red  [LED-0603]  71.12,25.91 270 top
LED5  Green  [LED-0603]  66.04,25.91 270 top
LED6  Green  [LED-0603]  60.96,25.91 270 top
LED7  Red  [LED-0603]  114.3,25.91 270 top
LED8  Green  [LED-0603]  109.22,25.91 270 top
LED9  Green  [LED-0603]  104.14,25.91 270 top
LED10  Red  [LED-0603]  157.48,25.91 270 top
LED11  Green  [LED-0603]  152.4,25.91 270 top
LED12  Green  [LED-0603]  147.32,25.91 270 top
LED13  Red  [LED-0603]  200.66,25.91 270 top
LED14  Green  [LED-0603]  195.58,25.91 270 top
LED15  Green  [LED-0603]  190.5,25.91 270 top
LED16  Red  [LED-0603]  243.84,25.91 270 top
LED17  Green  [LED-0603]  238.76,25.91 270 top
LED18  Green  [LED-0603]  233.68,25.91 270 top
LED19  Red  [LED-0603]  27.94,49.28 270 top
LED20  Green  [LED-0603]  22.86,49.28 270 top
LED21  Green  [LED-0603]  17.78,49.28 270 top
LED22  Red  [LED-0603]  71.12,49.28 270 top
LED23  Green  [LED-0603]  66.04,49.28 270 top
LED24  Green  [LED-0603]  60.96,49.28 270 top
LED25  Red  [LED-0603]  114.3,49.28 270 top
LED26  Green  [LED-0603]  109.22,49.28 270 top
LED27  Green  [LED-0603]  104.14,49.28 270 top
LED28  Red  [LED-0603]  157.48,49.28 270 top
LED29  Green  [LED-0603]  152.4,49.28 270 top
LED30  Green  [LED-0603]  147.32,49.28 270 top
LED31  Red  [LED-0603]  200.66,49.28 270 top
LED32  Green  [LED-0603]  195.58,49.28 270 top
LED33  Green  [LED-0603]  190.5,49.28 270 top
LED34  Red  [LED-0603]  243.84,49.28 270 top
LED35  Green  [LED-0603]  238.76,49.28 270 top
LED36  Green  [LED-0603]  233.68,49.28 270 top
LED37  Red  [LED-0603]  27.94,72.64 270 top
LED38  Green  [LED-0603]  22.86,72.64 270 top
LED39  Green  [LED-0603]  17.78,72.64 270 top
LED40  Red  [LED-0603]  71.12,72.64 270 top
LED41  Green  [LED-0603]  66.04,72.64 270 top
LED42  Green  [LED-0603]  60.96,72.64 270 top
LED43  Red  [LED-0603]  114.3,72.64 270 top
LED44  Green  [LED-0603]  109.22,72.64 270 top
LED45  Green  [LED-0603]  104.14,72.64 270 top
LED46  Red  [LED-0603]  157.48,72.64 270 top
LED47  Green  [LED-0603]  152.4,72.64 270 top
LED48  Green  [LED-0603]  147.32,72.64 270 top
LED49  Red  [LED-0603]  200.66,72.64 270 top
LED50  Green  [LED-0603]  195.58,72.64 270 top
LED51  Green  [LED-0603]  190.5,72.64 270 top
LED52  Red  [LED-0603]  243.84,72.64 270 top
LED53  Green  [LED-0603]  238.76,72.64 270 top
LED54  Green  [LED-0603]  233.68,72.64 270 top
LED55  Red  [LED-0603]  27.94,96.01 270 top
LED56  Green  [LED-0603]  22.86,96.01 270 top
LED57  Green  [LED-0603]  17.78,96.01 270 top
LED58  Red  [LED-0603]  71.12,96.01 270 top
LED59  Green  [LED-0603]  66.04,96.01 270 top
LED60  Green  [LED-0603]  60.96,96.01 270 top
LED61  Red  [LED-0603]  114.3,96.01 270 top
LED62  Green  [LED-0603]  109.22,96.01 270 top
LED63  Green  [LED-0603]  104.14,96.01 270 top
LED64  Red  [LED-0603]  157.48,96.01 270 top
LED65  Green  [LED-0603]  152.4,96.01 270 top
LED66  Green  [LED-0603]  147.32,96.01 270 top
LED67  Red  [LED-0603]  200.66,96.01 270 top
LED68  Green  [LED-0603]  195.58,96.01 270 top
LED69  Green  [LED-0603]  190.5,96.01 270 top
LED70  Red  [LED-0603]  243.84,96.01 270 top
LED71  Green  [LED-0603]  238.76,96.01 270 top
LED72  Green  [LED-0603]  233.68,96.01 270 top
LED73  Red  [LED-0603]  27.94,119.38 270 top
LED74  Green  [LED-0603]  22.86,119.38 270 top
LED75  Green  [LED-0603]  17.78,119.38 270 top
LED76  Red  [LED-0603]  71.12,119.38 270 top
LED77  Green  [LED-0603]  66.04,119.38 270 top
LED78  Green  [LED-0603]  60.96,119.38 270 top
LED79  Red  [LED-0603]  114.3,119.38 270 top
LED80  Green  [LED-0603]  109.22,119.38 270 top
LED81  Green  [LED-0603]  104.14,119.38 270 top
LED82  Red  [LED-0603]  157.48,119.38 270 top
LED83  Green  [LED-0603]  152.4,119.38 270 top
LED84  Green  [LED-0603]  147.32,119.38 270 top
LED85  Red  [LED-0603]  200.66,119.38 270 top
LED86  Green  [LED-0603]  195.58,119.38 270 top
LED87  Green  [LED-0603]  190.5,119.38 270 top
LED88  Red  [LED-0603]  243.84,119.38 270 top
LED89  Green  [LED-0603]  238.76,119.38 270 top
LED90  Green  [LED-0603]  233.68,119.38 270 top
R1  330  [0402-RES]  27.94,24.64 0 top
R2  330  [0402-RES]  22.86,24.64 0 top
R3  330  [0402-RES]  17.78,24.64 0 top
R4  220  [0402-RES]  35.56,23.37 180 top
R5  330  [0402-RES]  71.12,24.64 0 top
R6  330  [0402-RES]  66.04,24.64 0 top
R7  330  [0402-RES]  60.96,24.64 0 top
R8  220  [0402-RES]  78.74,23.37 180 top
R9  330  [0402-RES]  114.3,24.64 0 top
R10  330  [0402-RES]  109.22,24.64 0 top
R11  330  [0402-RES]  104.14,24.64 0 top
R12  220  [0402-RES]  121.92,23.37 180 top
R13  330  [0402-RES]  157.48,24.64 0 top
R14  330  [0402-RES]  152.4,24.64 0 top
R15  330  [0402-RES]  147.32,24.64 0 top
R16  220  [0402-RES]  165.1,23.37 180 top
R17  330  [0402-RES]  200.66,24.64 0 top
R18  330  [0402-RES]  195.58,24.64 0 top
R19  330  [0402-RES]  190.5,24.64 0 top
R20  220  [0402-RES]  208.28,23.37 180 top
R21  330  [0402-RES]  243.84,24.64 0 top
R22  330  [0402-RES]  238.76,24.64 0 top
R23  330  [0402-RES]  233.68,24.64 0 top
R24  220  [0402-RES]  251.46,23.37 180 top
R25  330  [0402-RES]  27.94,48.01 0 top
R26  330  [0402-RES]  22.86,48.01 0 top
R27  330  [0402-RES]  17.78,48.01 0 top
R28  220  [0402-RES]  35.56,46.74 180 top
R29  330  [0402-RES]  71.12,48.01 0 top
R30  330  [0402-RES]  66.04,48.01 0 top
R31  330  [0402-RES]  60.96,48.01 0 top
R32  220  [0402-RES]  78.74,46.74 180 top
R33  330  [0402-RES]  114.3,48.01 0 top
R34  330  [0402-RES]  109.22,48.01 0 top
R35  330  [0402-RES]  104.14,48.01 0 top
R36  220  [0402-RES]  121.92,46.74 180 top
R37  330  [0402-RES]  157.48,48.01 0 top
R38  330  [0402-RES]  152.4,48.01 0 top
R39  330  [0402-RES]  147.32,48.01 0 top
R40  220  [0402-RES]  165.1,46.74 180 top
R41  330  [0402-RES]  200.66,48.01 0 top
R42  330  [0402-RES]  195.58,48.01 0 top
R43  330  [0402-RES]  190.5,48.01 0 top
R44  220  [0402-RES]  208.28,46.74 180 top
R45  330  [0402-RES]  243.84,48.01 0 top
R46  330  [0402-RES]  238.76,48.01 0 top
R47  330  [0402-RES]  233.68,48.01 0 top
R48  220  [0402-RES]  251.46,46.74 180 top
R49  330  [0402-RES]  27.94,71.37 0 top
R50  330  [0402-RES]  22.86,71.37 0 top
R51  330  [0402-RES]  17.78,71.37 0 top
R52  220  [0402-RES]  35.56,70.1 180 top
R53  330  [0402-RES]  71.12,71.37 0 top
R54  330  [0402-RES]  66.04,71.37 0 top
R55  330  [0402-RES]  60.96,71.37 0 top
R56  220  [0402-RES]  78.74,70.1 180 top
R57  330  [0402-RES]  114.3,71.37 0 top
R58  330  [0402-RES]  109.22,71.37 0 top
R59  330  [0402-RES]  104.14,71.37 0 top
R60  220  [0402-RES]  121.92,70.1 180 top
R61  330  [0402-RES]  157.48,71.37 0 top
R62  330  [0402-RES]  152.4,71.37 0 top
R63  330  [0402-RES]  147.32,71.37 0 top
R64  220  [0402-RES]  165.1,70.1 180 top
R65  330  [0402-RES]  200.66,71.37 0 top
R66  330  [0402-RES]  195.58,71.37 0 top
R67  330  [0402-RES]  190.5,71.37 0 top
R68  220  [0402-RES]  208.28,70.1 180 top
R69  330  [0402-RES]  243.84,71.37 0 top
R70  330  [0402-RES]  238.76,71.37 0 top
R71  330  [0402-RES]  233.68,71.37 0 top
R72  220  [0402-RES]  251.46,70.1 180 top
R73  330  [0402-RES]  27.94,94.74 0 top
R74  330  [0402-RES]  22.86,94.74 0 top
R75  330  [0402-RES]  17.78,94.74 0 top
R76  220  [0402-RES]  35.56,93.47 180 top
R77  330  [0402-RES]  71.12,94.74 0 top
R78  330  [0402-RES]  66.04,94.74 0 top
R79  330  [0402-RES]  60.96,94.74 0 top
R80  220  [0402-RES]  78.74,93.47 180 top
R81  330  [0402-RES]  114.3,94.74 0 top
R82  330  [0402-RES]  109.22,94.74 0 top
R83  330  [0402-RES]  104.14,94.74 0 top
R84  220  [0402-RES]  121.92,93.47 180 top
R85  330  [0402-RES]  157.48,94.74 0 top
R86  330  [0402-RES]  152.4,94.74 0 top
R87  330  [0402-RES]  147.32,94.74 0 top
R88  220  [0402-RES]  165.1,93.47 180 top
R89  330  [0402-RES]  200.66,94.74 0 top
R90  330  [0402-RES]  195.58,94.74 0 top
R91  330  [0402-RES]  190.5,94.74 0 top
R92  220  [0402-RES]  208.28,93.47 180 top
R93  330  [0402-RES]  243.84,94.74 0 top
R94  330  [0402-RES]  238.76,94.74 0 top
R95  330  [0402-RES]  233.68,94.74 0 top
R96  220  [0402-RES]  251.46,93.47 180 top
R97  330  [0402-RES]  27.94,118.11 0 top
R98  330  [0402-RES]  22.86,118.11 0 top
R99  330  [0402-RES]  17.78,118.11 0 top
R100  220  [0402-RES]  35.56,116.84 180 top
R101  330  [0402-RES]  71.12,118.11 0 top
R102  330  [0402-RES]  66.04,118.11 0 top
R103  330  [0402-RES]  60.96,118.11 0 top
R104  220  [0402-RES]  78.74,116.84 180 top
R105  330  [0402-RES]  114.3,118.11 0 top
R106  330  [0402-RES]  109.22,118.11 0 top
R107  330  [0402-RES]  104.14,118.11 0 top
R108  220  [0402-RES]  121.92,116.84 180 top
R109  330  [0402-RES]  157.48,118.11 0 top
R110  330  [0402-RES]  152.4,118.11 0 top
R111  330  [0402-RES]  147.32,118.11 0 top
R112  220  [0402-RES]  165.1,116.84 180 top
R113  330  [0402-RES]  200.66,118.11 0 top
R114  330  [0402-RES]  195.58,118.11 0 top
R115  330  [0402-RES]  190.5,118.11 0 top
R116  220  [0402-RES]  208.28,116.84 180 top
R117  330  [0402-RES]  243.84,118.11 0 top
R118  330  [0402-RES]  238.76,118.11 0 top
R119  330  [0402-RES]  233.68,118.11 0 top
R120  220  [0402-RES]  251.46,116.84 180 top
SJ1  SOLDERJUMPERNC2  [SJ_2S-NOTRACE]  63.88,14.48 180 top
SJ2  SOLDERJUMPERNC2  [SJ_2S-NOTRACE]  20.7,14.48 180 top
SJ3  SOLDERJUMPERNC2  [SJ_2S-NOTRACE]  107.06,14.48 180 top
SJ4  SOLDERJUMPERNC2  [SJ_2S-NOTRACE]  150.24,14.48 180 top
SJ5  SOLDERJUMPERNC2  [SJ_2S-NOTRACE]  193.42,14.48 180 top
SJ6  SOLDERJUMPERNC2  [SJ_2S-NOTRACE]  236.6,14.48 180 top
SJ7  SOLDERJUMPERNC2  [SJ_2S-NOTRACE]  20.7,37.85 180 top
SJ8  SOLDERJUMPERNC2  [SJ_2S-NOTRACE]  63.88,37.85 180 top
SJ9  SOLDERJUMPERNC2  [SJ_2S-NOTRACE]  107.06,37.85 180 top
SJ10  SOLDERJUMPERNC2  [SJ_2S-NOTRACE]  150.24,37.85 180 top
SJ11  SOLDERJUMPERNC2  [SJ_2S-NOTRACE]  193.42,37.85 180 top
SJ12  SOLDERJUMPERNC2  [SJ_2S-NOTRACE]  236.6,37.85 180 top
SJ13  SOLDERJUMPERNC2  [SJ_2S-NOTRACE]  20.7,61.21 180 top
SJ14  SOLDERJUMPERNC2  [SJ_2S-NOTRACE]  63.88,61.21 180 top
SJ15  SOLDERJUMPERNC2  [SJ_2S-NOTRACE]  107.06,61.21 180 top
SJ16  SOLDERJUMPERNC2  [SJ_2S-NOTRACE]  150.24,61.21 180 top
SJ17  SOLDERJUMPERNC2  [SJ_2S-NOTRACE]  193.42,61.21 180 top
SJ18  SOLDERJUMPERNC2  [SJ_2S-NOTRACE]  236.6,61.21 180 top
SJ19  SOLDERJUMPERNC2  [SJ_2S-NOTRACE]  20.7,84.58 180 top
SJ20  SOLDERJUMPERNC2  [SJ_2S-NOTRACE]  63.88,84.58 180 top
SJ21  SOLDERJUMPERNC2  [SJ_2S-NOTRACE]  107.06,84.58 180 top
SJ22  SOLDERJUMPERNC2  [SJ_2S-NOTRACE]  150.24,84.58 180 top
SJ23  SOLDERJUMPERNC2  [SJ_2S-NOTRACE]  193.42,84.58 180 top
SJ24  SOLDERJUMPERNC2  [SJ_2S-NOTRACE]  236.6,84.58 180 top
SJ25  SOLDERJUMPERNC2  [SJ_2S-NOTRACE]  20.7,107.95 180 top
SJ26  SOLDERJUMPERNC2  [SJ_2S-NOTRACE]  63.88,107.95 180 top
SJ27  SOLDERJUMPERNC2  [SJ_2S-NOTRACE]  107.06,107.95 180 top
SJ28  SOLDERJUMPERNC2  [SJ_2S-NOTRACE]  150.24,107.95 180 top
SJ29  SOLDERJUMPERNC2  [SJ_2S-NOTRACE]  193.42,107.95 180 top
SJ30  SOLDERJUMPERNC2  [SJ_2S-NOTRACE]  236.6,107.95 180 top
U1  FT232R  [SSOP28DB]  26.67,18.29 270 top
U2  RS485  [SO08]  34.29,18.29 0 top
U3  FT232R  [SSOP28DB]  69.85,18.29 270 top
U4  RS485  [SO08]  77.47,18.29 0 top
U5  FT232R  [SSOP28DB]  113.03,18.29 270 top
U6  RS485  [SO08]  120.65,18.29 0 top
U7  FT232R  [SSOP28DB]  156.21,18.29 270 top
U8  RS485  [SO08]  163.83,18.29 0 top
U9  FT232R  [SSOP28DB]  199.39,18.29 270 top
U10  RS485  [SO08]  207.01,18.29 0 top
U11  FT232R  [SSOP28DB]  242.57,18.29 270 top
U12  RS485  [SO08]  250.19,18.29 0 top
U13  FT232R  [SSOP28DB]  26.67,41.66 270 top
U14  RS485  [SO08]  34.29,41.66 0 top
U15  FT232R  [SSOP28DB]  69.85,41.66 270 top
U16  RS485  [SO08]  77.47,41.66 0 top
U17  FT232R  [SSOP28DB]  113.03,41.66 270 top
U18  RS485  [SO08]  120.65,41.66 0 top
U19  FT232R  [SSOP28DB]  156.21,41.66 270 top
U20  RS485  [SO08]  163.83,41.66 0 top
U21  FT232R  [SSOP28DB]  199.39,41.66 270 top
U22  RS485  [SO08]  207.01,41.66 0 top
U23  FT232R  [SSOP28DB]  242.57,41.66 270 top
U24  RS485  [SO08]  250.19,41.66 0 top
U25  FT232R  [SSOP28DB]  26.67,65.02 270 top
U26  RS485  [SO08]  34.29,65.02 0 top
U27  FT232R  [SSOP28DB]  69.85,65.02 270 top
U28  RS485  [SO08]  77.47,65.02 0 top
U29  FT232R  [SSOP28DB]  113.03,65.02 270 top
U30  RS485  [SO08]  120.65,65.02 0 top
U31  FT232R  [SSOP28DB]  156.21,65.02 270 top
U32  RS485  [SO08]  163.83,65.02 0 top
U33  FT232R  [SSOP28DB]  199.39,65.02 270 top
U34  RS485  [SO08]  207.01,65.02 0 top
U35  FT232R  [SSOP28DB]  242.57,65.02 270 top
U36  RS485  [SO08]  250.19,65.02 0 top
U37  FT232R  [SSOP28DB]  26.67,88.39 270 top
U38  RS485  [SO08]  34.29,88.39 0 top
U39  FT232R  [SSOP28DB]  69.85,88.39 270 top
U40  RS485  [SO08]  77.47,88.39 0 top
U41  FT232R  [SSOP28DB]  113.03,88.39 270 top
U42  RS485  [SO08]  120.65,88.39 0 top
U43  FT232R  [SSOP28DB]  156.21,88.39 270 top
U44  RS485  [SO08]  163.83,88.39 0 top
U45  FT232R  [SSOP28DB]  199.39,88.39 270 top
U46  RS485  [SO08]  207.01,88.39 0 top
U47  FT232R  [SSOP28DB]  242.57,88.39 270 top
U48  RS485  [SO08]  250.19,88.39 0 top
U49  FT232R  [SSOP28DB]  26.67,111.76 270 top
U50  RS485  [SO08]  34.29,111.76 0 top
U51  FT232R  [SSOP28DB]  69.85,111.76 270 top
U52  RS485  [SO08]  77.47,111.76 0 top
U53  FT232R  [SSOP28DB]  113.03,111.76 270 top
U54  RS485  [SO08]  120.65,111.76 0 top
U55  FT232R  [SSOP28DB]  156.21,111.76 270 top
U56  RS485  [SO08]  163.83,111.76 0 top
U57  FT232R  [SSOP28DB]  199.39,111.76 270 top
U58  RS485  [SO08]  207.01,111.76 0 top
U59  FT232R  [SSOP28DB]  242.57,111.76 270 top
U60  RS485  [SO08]  250.19,111.76 0 top
U$1  LOGO-SFENEW  [SFE-NEW-WEBLOGO]  63.63,27.69 270 bottom
U$2  LOGO-SFENEW  [SFE-NEW-WEBLOGO]  20.45,27.69 270 bottom
U$3  LOGO-SFENEW  [SFE-NEW-WEBLOGO]  106.81,27.69 270 bottom
U$4  LOGO-SFENEW  [SFE-NEW-WEBLOGO]  149.99,27.69 270 bottom
U$5  LOGO-SFENEW  [SFE-NEW-WEBLOGO]  193.17,27.69 270 bottom
U$6  LOGO-SFENEW  [SFE-NEW-WEBLOGO]  236.35,27.69 270 bottom
U$7  LOGO-SFENEW  [SFE-NEW-WEBLOGO]  20.45,51.05 270 bottom
U$8  LOGO-SFENEW  [SFE-NEW-WEBLOGO]  63.63,51.05 270 bottom
U$9  LOGO-SFENEW  [SFE-NEW-WEBLOGO]  106.81,51.05 270 bottom
U$10  LOGO-SFENEW  [SFE-NEW-WEBLOGO]  149.99,51.05 270 bottom
U$11  LOGO-SFENEW  [SFE-NEW-WEBLOGO]  193.17,51.05 270 bottom
U$12  LOGO-SFENEW  [SFE-NEW-WEBLOGO]  236.35,51.05 270 bottom
U$13  LOGO-SFENEW  [SFE-NEW-WEBLOGO]  20.45,74.42 270 bottom
U$14  LOGO-SFENEW  [SFE-NEW-WEBLOGO]  63.63,74.42 270 bottom
U$15  LOGO-SFENEW  [SFE-NEW-WEBLOGO]  106.81,74.42 270 bottom
U$16  LOGO-SFENEW  [SFE-NEW-WEBLOGO]  149.99,74.42 270 bottom
U$17  LOGO-SFENEW  [SFE-NEW-WEBLOGO]  193.17,74.42 270 bottom
U$18  LOGO-SFENEW  [SFE-NEW-WEBLOGO]  236.35,74.42 270 bottom
U$19  LOGO-SFENEW  [SFE-NEW-WEBLOGO]  20.45,97.79 270 bottom
U$20  LOGO-SFENEW  [SFE-NEW-WEBLOGO]  63.63,97.79 270 bottom
U$21  LOGO-SFENEW  [SFE-NEW-WEBLOGO]  106.81,97.79 270 bottom
U$22  LOGO-SFENEW  [SFE-NEW-WEBLOGO]  149.99,97.79 270 bottom
U$23  LOGO-SFENEW  [SFE-NEW-WEBLOGO]  193.17,97.79 270 bottom
U$24  LOGO-SFENEW  [SFE-NEW-WEBLOGO]  236.35,97.79 270 bottom
U$25  LOGO-SFENEW  [SFE-NEW-WEBLOGO]  20.45,121.16 270 bottom
U$26  LOGO-SFENEW  [SFE-NEW-WEBLOGO]  63.63,121.16 270 bottom
U$27  LOGO-SFENEW  [SFE-NEW-WEBLOGO]  106.81,121.16 270 bottom
U$28  LOGO-SFENEW  [SFE-NEW-WEBLOGO]  149.99,121.16 270 bottom
U$29  LOGO-SFENEW  [SFE-NEW-WEBLOGO]  193.17,121.16 270 bottom
U$30  LOGO-SFENEW  [SFE-NEW-WEBLOGO]  236.35,121.16 270 bottom
X1  USBSMD  [USB-MINIB]  58.42,18.29 0 top
X2  USBSMD  [USB-MINIB]  15.24,18.29 0 top
X3  USBSMD  [USB-MINIB]  101.6,18.29 0 top
X4  USBSMD  [USB-MINIB]  144.78,18.29 0 top
X5  USBSMD  [USB-MINIB]  187.96,18.29 0 top
X6  USBSMD  [USB-MINIB]  231.14,18.29 0 top
X7  USBSMD  [USB-MINIB]  15.24,41.66 0 top
X8  USBSMD  [USB-MINIB]  58.42,41.66 0 top
X9  USBSMD  [USB-MINIB]  101.6,41.66 0 top
X10  USBSMD  [USB-MINIB]  144.78,41.66 0 top
X11  USBSMD  [USB-MINIB]  187.96,41.66 0 top
X12  USBSMD  [USB-MINIB]  231.14,41.66 0 top
X13  USBSMD  [USB-MINIB]  15.24,65.02 0 top
X14  USBSMD  [USB-MINIB]  58.42,65.02 0 top
X15  USBSMD  [USB-MINIB]  101.6,65.02 0 top
X16  USBSMD  [USB-MINIB]  144.78,65.02 0 top
X17  USBSMD  [USB-MINIB]  187.96,65.02 0 top
X18  USBSMD  [USB-MINIB]  231.14,65.02 0 top
X19  USBSMD  [USB-MINIB]  15.24,88.39 0 top
X20  USBSMD  [USB-MINIB]  58.42,88.39 0 top
X21  USBSMD  [USB-MINIB]  101.6,88.39 0 top
X22  USBSMD  [USB-MINIB]  144.78,88.39 0 top
X23  USBSMD  [USB-MINIB]  187.96,88.39 0 top
X24  USBSMD  [USB-MINIB]  231.14,88.39 0 top
X25  USBSMD  [USB-MINIB]  15.24,111.76 0 top
X26  USBSMD  [USB-MINIB]  58.42,111.76 0 top
X27  USBSMD  [USB-MINIB]  101.6,111.76 0 top
X28  USBSMD  [USB-MINIB]  144.78,111.76 0 top
X29  USBSMD  [USB-MINIB]  187.96,111.76 0 top
X30  USBSMD  [USB-MINIB]  231.14,111.76 0 top

## Library data of the parts
C1-C120 F1-F30 JP1-JP330 LED1-LED90 R1-R120 SJ1-SJ30 U1-U60 U$1-U$30 X1-X30 = SparkFun
E$1 = SparkFun-Retired
E$5 E$6 = SparkFun-Aesthetics